# Altium PCB Печатная плата Peggy Receiver.PcbDoc
Units mm, origin at the board's own origin, x right, y up, seen from the top; angles counter-clockwise.
Board outline 36.5 x 63 mm, 2 copper layers (Top Layer, Bottom Layer); 41 components, 35 nets, 220 pads, 0 vias.
Unrouted connection lines stored in the file: 145.
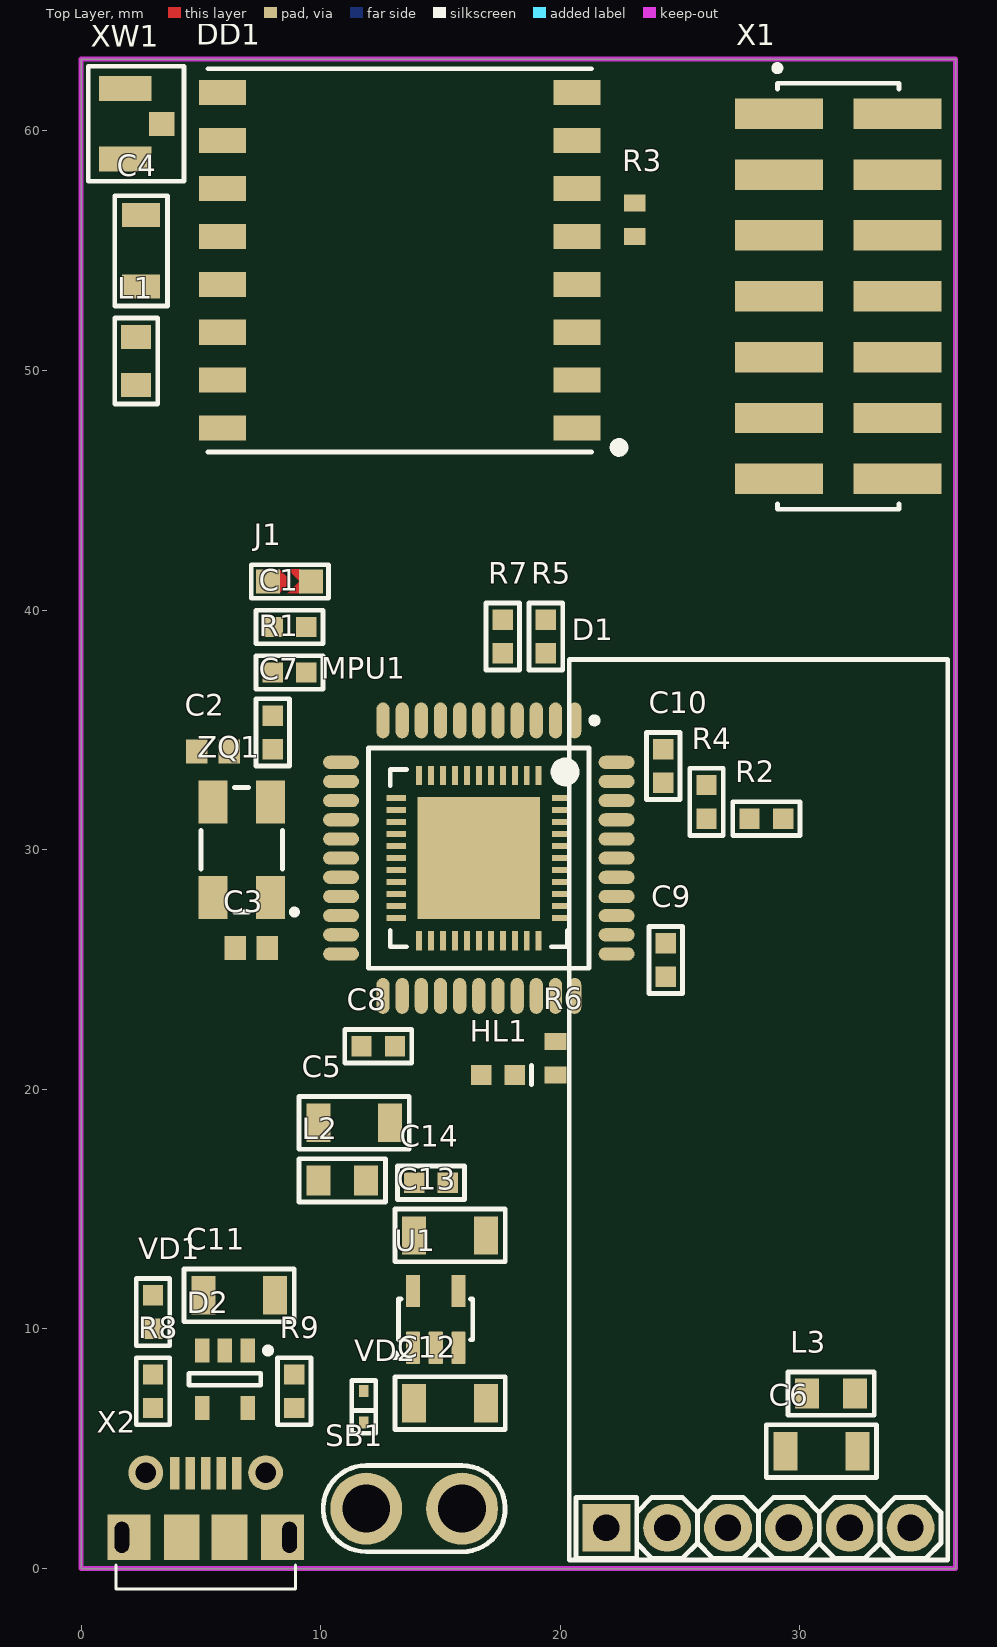
[diagram p0: Top Layer view]
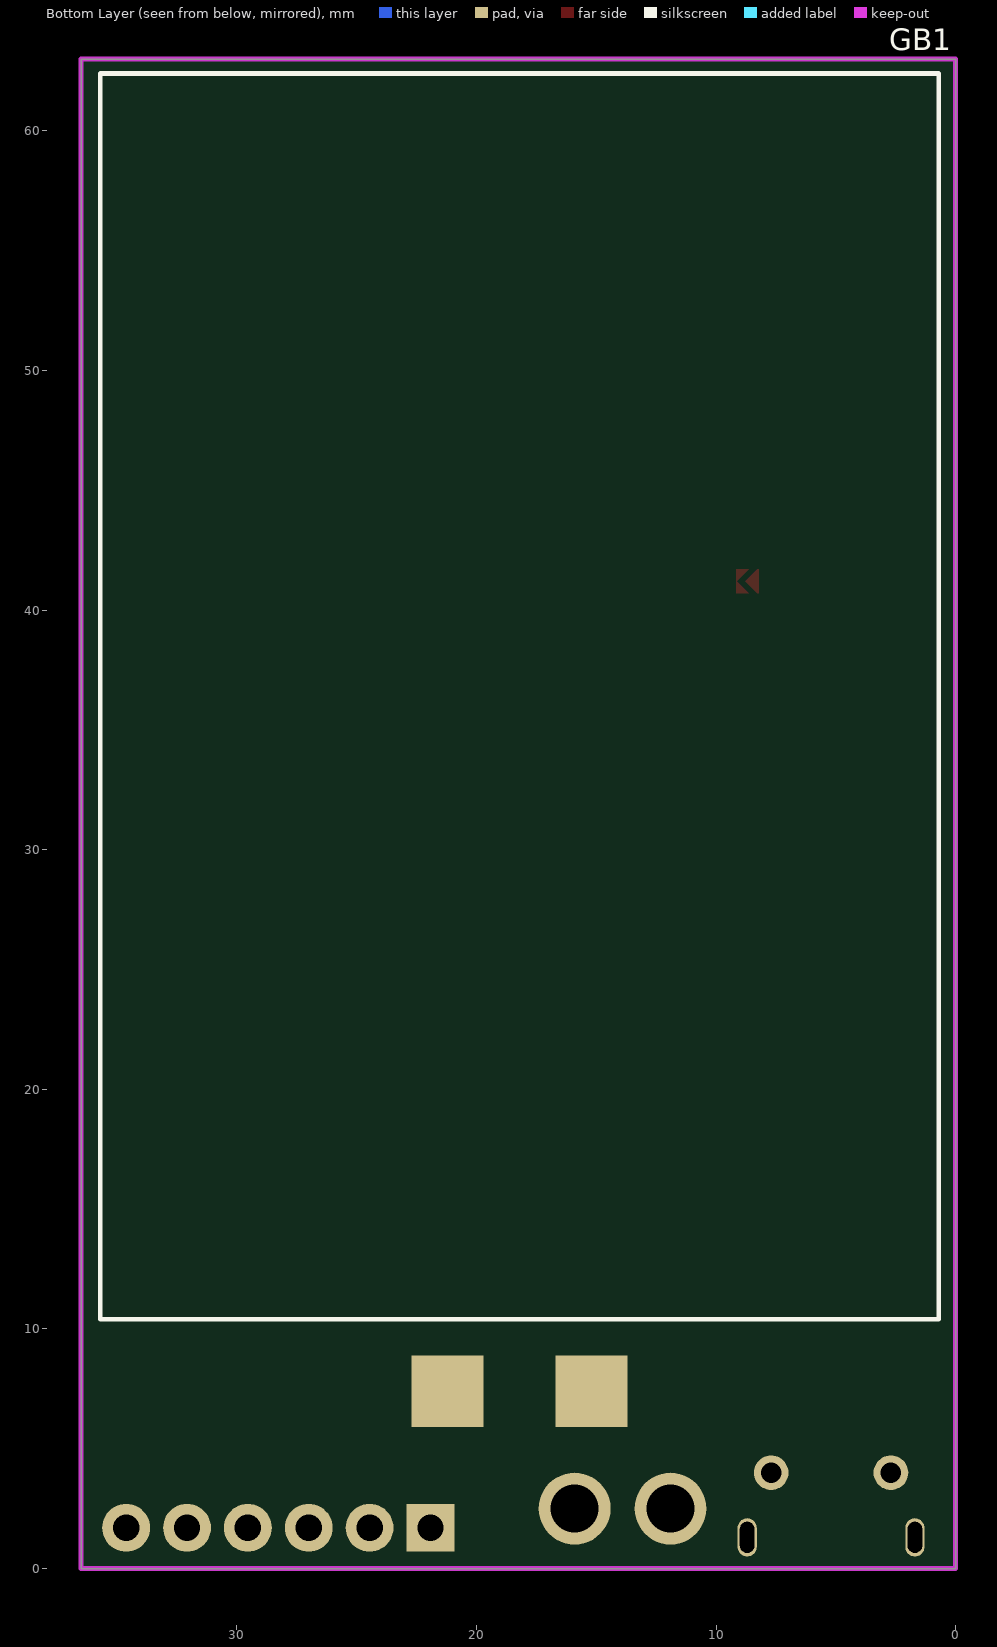
[diagram p1: Bottom Layer view, seen from below]

## Layer stack, top to bottom
Top Solder: solder mask 0.0102, Solder Resist, Dk 3.5
Top Layer: signal copper 0.0356
Dielectric 1: dielectric 0.32, FR-4, Dk 4.8
Bottom Layer: signal copper 0.0356
Bottom Solder: solder mask 0.0102, Solder Resist, Dk 3.5

## Board outline
0,0 0,63 36.5,63 36.5,0

## Design rules (kind name [scope] priority, off if disabled: settings)
Clearance [All] p1: gap=0.2 ignorepadtopadclearanceinfootprint=FALSE except(0: Arc-Hole Track-Hole SMDPad-Hole THPad-Hole Via-Hole Fill-Hole Poly-Hole Region-Hole Text-Hole)
PolygonConnect [All] p1: connectstyle=Relief reliefconductorwidth=0.254 reliefentries=4 polygonreliefangle="90 Angle" airgapwidth=0.254
RoutingVias [All] p1: holewidth=0.711 width=1.27 viastyle="Through Hole" minholewidth=0.711 minwidth=1.27 maxholewidth=0.711 maxwidth=1.27
SolderMaskExpansion [All] p1: expansion=0.102 istentingtop=FALSE
Width [All] p1: maxlimit=0.254 minlimit=0.254 preferedwidth=0.254
30 further rules are at their usual default settings.

## Classes and differential pairs
component class "Схема питания": C11 C12 C13 C14 D2 GB1 R8 R9 SB1 U1 VD1 VD2 X2
component class "Блок МК и радиомодуля Peggy Receiver": C1 C2 C3 C4 C5 C6 C7 C8 C9 C10 D1 DD1 HL1 J1 L1 L2 L3 MPU1 R1 R2 R3 R4 R5 R6 R7 WA1 WA2 X1 XW1 ZQ1

## Components (designator, comment, footprint, x,y, rotation, side; value= is the part's Value field where it differs from the comment)
C1 "0.1uF" CH0603C 8.7,39.3 r180 top
C2 "CC0603JPNPO9BN270" CAPC1608X87X35NL15T15 5.5,34.1 r180 top
C3 "CC0603JPNPO9BN270" CAPC1608X87X35NL15T15 7.1,25.9 r0 top
C4 "10uF" CH1206C 2.5,55 r90 top
C5 "10uF" CH1206C 11.4,18.6 r0 top
C6 "10uF" CH1206C 30.9,4.9 r180 top
C7 "0.1uF" CH0603C 8,34.9 r270 top
C8 "0.1uF" CH0603C 12.4,21.8 r180 top
C9 "0.1uF" CH0603C 24.4,25.4 r90 top
C10 "0.1uF" CH0603C 24.3,33.5 r270 top
C11 "10uF" CH1206C 6.6,11.4 r0 top
C12 "10uF" CH1206C 15.4,6.9 r0 top
C13 "10uF" CH1206C 15.4,13.9 r0 top
C14 "1uF" CH0603C 14.6,16.1 r0 top
D1 "HC-08" "MOD: SH-HC-08" 21.92,1.7 r90 top
D2 "MCP73831T-2ATI/OT" SOT23-5 6,7.9 r270 top
DD1 "RFM95W-868S2" RFM95W-868S2 20.7,47.6 r180 top
GB1 "LP103450JH+PCM+PTC+2 WIRES 70MM" "BAT: 34.5X52MM" 18.2,36.4 r0 bottom
HL1 "150060GS75000" CH0603LG 17.4,20.6 r180 top
J1 "Jumper-2" "CON: JUMPER_2" 8.7,41.2 r0 top
L1 "MH2029-471Y" MH2029-471Y-Footprint-1 2.3,50.4 r270 top
L2 "MH2029-471Y" MH2029-471Y-Footprint-1 10.9,16.2 r180 top
L3 "MH2029-471Y" MH2029-471Y-Footprint-1 31.3,7.3 r0 top
MPU1 "ATMEGA32U4-AU" ATMEGA32U4-MU 16.6,29.65 r270 top
R1 "RMCF0603FT4K70" CH0603R 8.7,37.4 r180 top
R2 "1k" CH0603R 28.6,31.3 r0 top
R3 "Resistor 100k +/-1% 0603 100 mW" RESC1608X55X25NL10T15 23.1,56.3 r90 top value=100k
R4 "3.6K" CH0603R 26.1,32 r270 top
R5 "22" CH0603R 19.4,38.9 r270 top
R6 "RMCF0603JT510R" RESC1608X55X25NL10T15 19.8,21.3 r270 top
R7 "22" CH0603R 17.6,38.9 r270 top
R8 "1k" CH0603R 3,7.4 r270 top
R9 "1k" CH0603R 8.9,7.4 r270 top
SB1 "\"Кнопка\"" "BUT: 2PADS 2x2mm" 11.9,2.5 r0 top
U1 "AP2112K-3.3TRG1" SOT-25 14.8,10.4 r90 top
VD1 "" CH0603LR 3,10.7 r90 top
VD2 "BAT54XV2T1G" SOD523 11.8,7.4 r270 top
X1 "TSM-107-01-T-DV" "CON: TSM-107-01-T-DV" 31.6,53.1 r270 top
X2 "\"microUSB\"" "CON: MicroUSB - TH" 5.2,1.3 r0 top
XW1 "u.Fl" "CON: u.Fl" 2.6,60.3 r90 top
ZQ1 "FY0800018" FY0800018-Footprint-1 6.7,30 r90 top

## Footprints (in the part's own frame and the unit in brackets; to place one, negate y for a bottom-side part, rotate by r counter-clockwise, add the part's x,y. Pads: shape width x height; smd on the part's side, far side on the other; paste and mask are expansions set on the pad)
ATMEGA32U4-MU [mm] "44-VQFN (7x7)"
  oval 1.5x0.55 smd: 1(-5.75,4) 2(-5.75,3.2) 3(-5.75,2.4) 4(-5.75,1.6) 5(-5.75,0.8) 6(-5.75,0) 7(-5.75,-0.8) 8(-5.75,-1.6) 9(-5.75,-2.4) 10(-5.75,-3.2) 11(-5.75,-4) 23(5.75,-4) 24(5.75,-3.2) 25(5.75,-2.4) 26(5.75,-1.6) 27(5.75,-0.8) 28(5.75,0) 29(5.75,0.8) 30(5.75,1.6) 31(5.75,2.4) 32(5.75,3.2) 33(5.75,4)
  rect 0.8x0.25 smd: 1(-3.45,2.5) 2(-3.45,2) 3(-3.45,1.5) 4(-3.45,1) 5(-3.45,0.5) 6(-3.45,0) 7(-3.45,-0.5) 8(-3.45,-1) 9(-3.45,-1.5) 10(-3.45,-2) 11(-3.45,-2.5) 23(3.45,-2.5) 24(3.45,-2) 25(3.45,-1.5) 26(3.45,-1) 27(3.45,-0.5) 28(3.45,0) 29(3.45,0.5) 30(3.45,1) 31(3.45,1.5) 32(3.45,2) 33(3.45,2.5)
  oval 0.55x1.5 smd: 12(-4,-5.75) 13(-3.2,-5.75) 14(-2.4,-5.75) 15(-1.6,-5.75) 16(-0.8,-5.75) 17(0,-5.75) 18(0.8,-5.75) 19(1.6,-5.75) 20(2.4,-5.75) 21(3.2,-5.75) 22(4,-5.75) 34(4,5.75) 35(3.2,5.75) 36(2.4,5.75) 37(1.6,5.75) 38(0.8,5.75) 39(0,5.75) 40(-0.8,5.75) 41(-1.6,5.75) 42(-2.4,5.75) 43(-3.2,5.75) 44(-4,5.75)
  rect 0.25x0.8 smd: 12(-2.5,-3.45) 13(-2,-3.45) 14(-1.5,-3.45) 15(-1,-3.45) 16(-0.5,-3.45) 17(0,-3.45) 18(0.5,-3.45) 19(1,-3.45) 20(1.5,-3.45) 21(2,-3.45) 22(2.5,-3.45) 34(2.5,3.45) 35(2,3.45) 36(1.5,3.45) 37(1,3.45) 38(0.5,3.45) 39(0,3.45) 40(-0.5,3.45) 41(-1,3.45) 42(-1.5,3.45) 43(-2,3.45) 44(-2.5,3.45)
  rect 5.1x5.1 smd: 45(0,0)
  silkscreen extent -5.87,-4.6 4.6,4.95, body extent -6,-6 6,6, height 1.2
"BAT: 34.5X52MM" [mm]
  rect 3x3 smd: 1(-3,29) 2(3,29)
  silkscreen extent -17.5,-26 17.5,26
"BUT: 2PADS 2x2mm" [mm]
  round 3 hole 2: 1(0,0) 2(4,0)
  silkscreen extent -1.79,-1.8 5.79,1.8
CAPC1608X87X35NL15T15 [mm] "Chip Capacitor, 2-Leads, Body 1.75x0.95mm, IPC Medium Density"
  rect 0.9x1 smd: 1(-0.675,0) 2(0.675,0)
  body extent -0.87,-0.48 0.87,0.48, height 0.87
CH0603C [mm] "Chip Capacitor, 2-Leads, Body 1,53x0,85mm, IPC Medium Density"
  rect 0.85x0.85 smd: 1(-0.7,0) 2(0.7,0)
  silkscreen extent -1.4,-0.7 1.4,0.7, body extent -0.8,-0.4 0.8,0.4, height 0.3
CH0603LG [mm] "Chip Capacitor, 2-Leads, Body 1,53x0,85mm, IPC Medium Density"
  rect 0.85x0.85 smd: 1(-0.7,0) 2(0.7,0)
  silkscreen extent -1.4,-0.4 -1.4,0.4, body extent -0.8,-0.4 0.8,0.4, height 0.6
CH0603LR [mm] "Chip Capacitor, 2-Leads, Body 1,53x0,85mm, IPC Medium Density"
  rect 0.85x0.85 smd: 1(-0.7,0) 2(0.7,0)
  silkscreen extent -1.4,-0.7 1.4,0.7, body extent -0.8,-0.4 0.8,0.4, height 0.6
CH0603R [mm]
  rect 0.85x0.85 smd: 1(-0.7,0) 2(0.7,0)
  silkscreen extent -1.4,-0.7 1.4,0.7, body extent -0.8,-0.4 0.8,0.4, height 0.44
CH1206C [mm] "Non polar chip capacitor, size 1206"
  rect 1x1.6 smd: 1(-1.5,0) 2(1.5,0)
  silkscreen extent -2.3,-1.1 2.3,1.1, body extent -1.6,-0.8 1.6,0.8, height 1
"CON: JUMPER_2" [mm]
  rect 1x1 smd: 1(-0.9,0) 2(0.9,0)
  Top Layer region: -0.475,0.5 -0.425,0.5 0.075,0 -0.425,-0.5 -0.475,-0.5
  Top Layer region: -0.075,0.5 0.425,0 -0.075,-0.5 0.45,-0.5 0.45,0.5
  silkscreen extent -1.6,-0.7 1.63,0.7
"CON: MicroUSB - TH" [mm] "Micro USB on-pcb connector, female"
  rect 0.4x1.35 smd: 1(-1.3,2.675) 2(-0.65,2.675) 3(0,2.675) 4(0.65,2.675) 5(1.3,2.675)
  oval 0.8x1.6 hole 0.6 slot 1.3 at 90 deg: 6(-3.5,0) 6(3.5,0)
  rect 1.8x1.9 smd: 6(-3.2,0) 6(3.2,0)
  round 1.45 hole 0.85: 6(-2.5,2.7) 6(2.5,2.7)
  rect 1.5x1.9 smd: 6(-1,0) 6(1,0)
  silkscreen extent -3.75,-2.15 3.75,-1.15, body extent -4.1,-2.58 4.1,2.85, height 2.68
"CON: TSM-107-01-T-DV" [mm]
  rect 1.27x3.68 smd: 1(-7.62,-2.475) 2(-7.62,2.475) 3(-5.08,-2.475) 4(-5.08,2.475) 5(-2.54,-2.475) 6(-2.54,2.475) 7(0,-2.475) 8(0,2.475) 9(2.54,-2.475) 10(2.54,2.475) 11(5.08,-2.475) 12(5.08,2.475) 13(7.62,-2.475) 14(7.62,2.475)
  silkscreen extent -9.65,-2.66 8.89,2.54, body extent -8.89,-3.68 8.89,3.68, height 9.65
"CON: u.Fl" [mm]
  rect 1x1.05 smd: 1(0,-0.763)
  rect 1.05x2.2 smd: 2(-1.475,0.763) 2(1.475,0.763)
  silkscreen extent -2.4,-1.7 2.4,2.3, body extent -1.5,-0.95 1.5,1.9, height 1.27
FY0800018-Footprint-1 [mm]
  rect 1.8x1.2 smd: 1(-2,-1.2) 2(2,-1.2) 3(2,1.2) 4(-2,1.2)
  silkscreen extent -2.7,-2.3 2.6,1.7, body extent -2.5,-1.59 2.5,1.59, height 1.1
MH2029-471Y-Footprint-1 [mm]
  rect 1x1.25 smd: 1(-1,0) 2(1,0)
  silkscreen extent -1.8,-0.9 1.8,0.9, body extent -1,-0.62 1,0.63, height 0.85
"MOD: SH-HC-08" [mm] "Bluetooth 4.0 BLE Module"
  rect 2x2 hole 1.1: 1(0,0)
  round 2 hole 1.1: 2(0,-2.54) 3(0,-5.08) 4(0,-7.62) 5(0,-10.16) 6(0,-12.7)
  silkscreen extent -1.34,-14.25 36.24,1.55, body extent -1.36,-14.17 36.23,1.53, height 6.31
RESC1608X55X25NL10T15 [mm] "Chip Resistor, 2-Leads, Body 1.70x0.90mm, IPC Medium Density"
  rect 0.7x0.9 smd: 1(-0.7,0) 2(0.7,0)
  body extent -0.85,-0.45 0.85,0.45, height 0.55
RFM95W-868S2 [mm] "RFID module"
  rect 1.95x1.05 smd: 1(0,0) 2(0,-2) 3(0,-4) 4(0,-6) 5(0,-8) 6(0,-10) 7(0,-12) 8(0,-14) 9(14.8,-14) 10(14.8,-12) 11(14.8,-10) 12(14.8,-8) 13(14.8,-6) 14(14.8,-4) 15(14.8,-2) 16(14.8,0)
  silkscreen extent -2.04,-15 15.4,1.1, body extent -0.6,-14.93 15.4,0.97, height 2.24
SOD523 [mm]
  rect 0.5x0.4 smd: 1(0,0) 2(1.3,0)
  silkscreen extent -0.45,-0.5 1.75,0.5, body extent -0.17,-0.4 1.48,0.4, height 0.65
SOT23-5 [mm] "SOT23, 5-Leads, Body 2,90x2,80mm, Pitch 0,95mm, IPC Medium Density"
  rect 1x0.6 smd: 1(-1.2,0.95) 2(-1.2,0) 3(-1.2,-0.95) 4(1.2,-0.95) 5(1.2,0.95)
  round 0.5 on Mech1: ""(-1.1,1.1)
  silkscreen extent -1.32,-1.5 0.25,1.92, body extent -1.5,-1.5 1.5,1.5, height 1.3
SOT-25 [mm]
  rrect15% 1.35x0.6 smd: 1(-1.185,0.95) 2(-1.185,0) 3(-1.185,-0.95) 4(1.185,-0.95) 5(1.185,0.95)
  silkscreen extent -1.6,-1.55 0.85,1.8, body extent -1.4,-1.5 1.4,1.5, height 1.4

## Part data
C1 C7 C8 C9 C10: library part Capacitor, Manufacturer="Murata Electronics", Supplier Part Number 1=490-4779-1-ND, ComponentKind="0603 (1608 Metric)", HelpURL=https://www.digikey.com/en/products/detail/murata-electronics/GCM188R71H104KA57D/1641653?s=N4IgTCBcDaIOIGECyBGAHGgSgdhQCRQAYAWAaQEEBWbAERAF0BfIA, Model=GCM188R71H104KA57D, Supplier 1=Digi-Key
C2 C3: library part CMP-009-00292-1, "0603 50V C0G 27pF 5% multilayer ceramic capacitor", Capacitance=27pF, Case Code (Imperial)=0603, Case Code (Metric)=1608, Dielectric=C0G, Manufacturer=YAGEO, Max Operating Temperature=125°C, Min Operating Temperature=-55°C, Package Quantity=15000, Tolerance=5%, Voltage Rating=50V, Case/Package=0603, Depth=0.8mm, Length=1.6mm, Manufacturer Part Number=CC0603JPNPO9BN270, Packaging="Tape and Reel", Pins=2, RoHS Compliant=Yes, Series=NP0, Termination=SMD/SMT
C4 C5 C6 C11 C12 C13: library part Capacitor, "CAP CER 10UF 16V X7R 1206", Manufacturer="Murata Electronics", Supplier Part Number 1=490-14746-1-ND, ComponentKind="1206 (3216 Metric)", HelpURL=https://www.digikey.com/en/products/detail/murata-electronics/GCM31CR71C106KA64K/2592432?s=N4IgTCBcDaIOIGECyBmAjAgSgdg2gDAGwDSAgoQCzEgC6AvkA, Model=GCM31CR71C106KA64K, Supplier 1=Digi-Key
C14: library part Capacitor, Manufacturer="Samsung Electro-Mechanics", Supplier Part Number 1=1276-1946-1-ND, ComponentKind="0603 (1608 Metric)", HelpURL=https://www.digikey.com/en/products/detail/samsung-electro-mechanics/CL10B105KP8NNNC/3887604, Model=CL10B105KP8NNNC, Supplier 1=Digi-Key
D1: "Bluetooth 4.0 module", Manufacturer=China, ComponentKind="Bluetooth 2.4GHz", Model=HC-08
D2: "Li-ion chargers", Manufacturer="Microchip Technology", Supplier Part Number 1=MCP73831T-2ATI/OTCT-ND, ComponentKind=SOT23-5, HelpURL=https://www.digikey.com/en/products/detail/microchip-technology/MCP73831T-2ATI-OT/964303, Model=MCP73831T-2ATI/OT, Supplier 1=Digi-Key
DD1: library part CMP-032-0024-3, "RF TXRX MODULE ISM<1GHZ", Case/Package=SMD/SMT, Current - Receiving=12.1mA, Current - Transmitting=120mA, Frequency=868MHz, Manufacturer="RF Solutions", Max Operating Temperature=70°C, Min Operating Temperature=-20°C, Data Rate=300Kbps, Interface=SPI, Manufacturer Part Number=RFM95W-868S2, Mount="Surface Mount", Packaging=Bulk, Sensitivity=-123dBm
GB1: "LiPo Battery", Manufacturer="Jauch Quartz", Supplier Part Number 1=1908-LP103450JH+PCM+PTC+2WIRES70MM-ND, HelpURL=https://www.digikey.com/en/products/detail/jauch-quartz/LP103450JH-PCM-PTC-2-WIRES-70MM/9560994, Model="LP103450JH+PCM+PTC+2 WIRES 70MM", Supplier 1=Digi-Key
HL1: library part CMP-007-00037-1, "WURTH ELEKTRONIK - 150060GS75000 - LED, Green, 520 nm, 3.2 V, 30 mA, 430 mcd RoHS Compliant: Yes", Case Code (Imperial)=0603, Case Code (Metric)=1608, Color=Green, Forward Current=30mA, Forward Voltage=3.2V, Manufacturer="Würth Elektronik", Max Operating Temperature=85°C, Min Operating Temperature=-40°C, Package Quantity=4000, Test Current=20mA, Case/Package=0603, Colour=Green, Dominant Wavelength=520nm, Height=0.7mm, Lead Free="Lead Free", Length=1.6mm, Lens Style=Clear,Rectangular, Luminous Intensity=430mcd, Manufacturer Part Number=150060GS75000, Mount="Surface Mount", Packaging="Tape and Reel", REACH SVHC=Unknown, RoHS Compliant=Yes, Viewing Angle=140°, Wavelength=520nm, Width=0.8mm
J1: "Jumper", Manufacturer=China, Model=PLS-2
L1 L2 L3: library part CMP-006-00041-1, "Ferrite Beads High Current Chip 470Ohm 25% 100MHz 1A 0.2Ohm DCR 0805 T/R", Case Code (Imperial)=0805, Case Code (Metric)=2012, DC Resistance (DCR)=200mR, Manufacturer="Bourns Inc.", Max Current Rating=1A, Max Operating Temperature=125°C, Min Operating Temperature=-55°C, Package Quantity=4000, Test Frequency=100MHz, Tolerance=25%, Case/Package=0805, Core Material=Ferrite, Depth=1.4mm, Height=0.043inch, Impedance=470, Length=0.079inch, Manufacturer Part Number=MH2029-471Y, Max DC Current=1A, Mount="Surface Mount", Number of Lines=1, Packaging="Tape and Reel", RoHS Compliant=Yes, Series=MH, Termination=SMD/SMT, Width=1.2mm
MPU1: library part CMP-020-00016-10, "8-bit Microcontroller with 32 Kbytes of ISP Flash and USB Controller, 2.7 to 5.5 V, -40 to 85 degC, 44-Pin QFP, Tray", Case/Package=TQFP, Frequency=16MHz, Manufacturer=Atmel, Manufacturer Part Number=ATMEGA32U4-AUR, Max Operating Temperature=85°C, Max Supply Voltage=5.5V, Min Operating Temperature=-40°C, Min Supply Voltage=2.7V, Package Description="44-Pin Thin Profile Plastic Quad Flat Papckage, Body 10 x 10 mm, Pitch 0.8 mm", Package Quantity=800, Package Reference=44ML, Package Version="Rev. J, 02/2014", ADC Channels=12, Datasheet URL=http://www.atmel.com/images/atmel-7766-8-bit-avr-atmega16u4-32u4_summary.pdf, Datasheet Version="Rev. 7766IS, 07/2015", Density=32KB, Ethernet Channels=0, I/Os=26, Interface=USART, Manufacturer URL=http://www.atmel.com/, Max Clock Frequency=16MHz, Mounting Technology=SM, Package URL=http://www.atmel.com/images/atmel-7766-8-bit-avr-atmega16u4-32u4_summary.pdf, Packaging=Tray, Pins=44, PWM Channels=8, RAM Size=2.5KB, RoHS Compliant=True
R1: library part CMP-009-00269-2, "Res Thick Film 0603 4.7K Ohm 1% 1/10W 100ppm/C Molded SMD SMD Paper T/R", Case Code (Imperial)=0603, Case Code (Metric)=1608, Manufacturer="Stackpole Electronics Inc", Max Operating Temperature=155°C, Max Power Dissipation=100mW, Min Operating Temperature=-55°C, Resistance=4.7k, Resistor Type="Thick Film", Temperature Coefficient=100ppm/°C, Tolerance=1%, Case/Package=0603, Component Comment="4.7k 100mW", Construction=Rectangular, Contact Plating=Tin,Matte, Depth=0.8mm, Features="Automotive AEC-Q200", Height=0.022inch, Lead Free="Lead Free", Length=1.55mm, Manufacturer Part Number=RMCF0603FT4K70, Military Standard=Not, Mount="Surface Mount", Number of Terminations=2, Packaging="Tape and Reel", Power Rating=100mW, Radiation Hardening=No, RoHS Compliant=Yes, Series=RMCF, Width=0.031inch
R2 R8 R9: library part Resistor, Manufacturer=YAGEO, Supplier Part Number 1=311-1.00KHRCT-ND, ComponentKind="0603 (1608 Metric)", HelpURL=https://www.digikey.com/en/products/detail/yageo/RC0603FR-071KL/726843, Model=RC0603FR-071KL, Supplier 1=Digi-Key
R3: library part CMP-009-00023-7, "Chip Resistor, 100 KOhm, +/- 1%, 0.1 W, -55 to 155 degC, 0603 (1608 Metric)", Case/Package=0603, Max Operating Temperature=155°C, Min Operating Temperature=-55°C, Power=100mW, Tolerance=1%, Voltage Rating=50V, Mounting Technology=SM, Pins=2, RoHS Compliant=True
R4: library part Resistor, "RES 3.6K OHM 1% 1/10W 0603", Manufacturer=YAGEO, Supplier Part Number 1=311-3.60KHRCT-ND, ComponentKind="0603 (1608 Metric)", HelpURL=https://www.digikey.com/en/products/detail/yageo/RC0603FR-073K6L/727132, Model=RC0603FR-073K6L, Supplier 1=Digi-Key
R5 R7: library part Resistor, "RES 22 OHM 1% 1/10W 0603", Manufacturer=YAGEO, Supplier Part Number 1=311-22.0HRCT-ND, ComponentKind=https://www.digikey.com/en/products/detail/yageo/RC0603FR-0722RL/727055, HelpURL=https://www.digikey.com/en/products/detail/yageo/RC0603FR-0722RL/727055, Model=RC0603FR-0722RL, Supplier 1=Digi-Key
R6: library part CMP-00079-1, "510 Ohms ±5% 0.1W, 1/10W Chip Resistor 0603 (1608 Metric) Automotive AEC-Q200 Thick Film", Case Code (Imperial)=0603, Case Code (Metric)=1608, Manufacturer="Stackpole Electronics Inc", Max Operating Temperature=155°C, Max Power Dissipation=100mW, Min Operating Temperature=-55°C, Resistance=510, Resistor Type="Thick Film", Temperature Coefficient=200ppm/°C, Tolerance=5%, Case/Package=0603, Construction=Rectangular, Contact Plating=Tin,Matte, Depth=0.8mm, Features="Automotive AEC-Q200", Height=0.022inch, Lead Free="Lead Free", Length=0.061inch, Manufacturer Part Number=RMCF0603JT510R, Military Standard=Not, Mount="Surface Mount", Number of Terminations=2, Packaging="Tape and Reel", Power Rating=100mW, Radiation Hardening=No, RoHS Compliant=Yes, Series=RMCF, Size Code=0603, Width=0.031inch
SB1: library part "Tactile switches", "Tactile switches", Manufacturer="CW Industries", Supplier Part Number 1=CW103-ND, ComponentKind=https://www.digikey.com/en/products/detail/cw-industries/GRB112B802BR1/2349683, HelpURL=https://www.digikey.com/en/products/detail/cw-industries/GRB112B802BR1/2349683, Model=GRB112B802BR1, Supplier 1=Digi-Key
U1: "IC REG LINEAR 3.3V 600MA SOT25", Manufacturer="Diodes Incorporated", Supplier Part Number 1=AP2112K-3.3TRG1DICT-ND, ComponentKind=SOT-25, ComponentLink1Description=HelpURL, ComponentLink1URL=https://www.digikey.com/en/products/detail/diodes-incorporated/AP61100Z6-7/11696569, HelpURL=https://www.digikey.com/en/products/detail/diodes-incorporated/AP2112K-3-3TRG1/4470746, Model=AP2112K-3.3TRG1, Supplier 1=Digi-Key
VD1: library part LED, Manufacturer="Lite-On Inc.", Supplier Part Number 1=160-1447-1-ND, ComponentKind="0603 (1608 Metric)", HelpURL=https://www.digikey.com/en/products/detail/liteon/LTST-C191KRKT/386837, Model=LTST-C191KRKT, Supplier 1=Digi-Key
VD2: library part Diod, Manufacturer=onsemi, Supplier Part Number 1=BAT54XV2T1GOSCT-ND, ComponentKind=SOD-523, HelpURL=https://www.digikey.com/en/products/detail/onsemi/BAT54XV2T1G/918321, Model=BAT54XV2T1G, Supplier 1=Digi-Key
X1: library part 14-Connector, Manufacturer="Samtec Inc.", Supplier Part Number 1=SAM10810-ND, ComponentKind="Connector Header Surface Mount 14 position", HelpURL=https://www.digikey.com/en/products/detail/samtec-inc/TSM-107-01-T-DV/2685677, Model=TSM-107-01-T-DV, Supplier 1=Digi-Key
X2: library part "USB - micro AB", "USB", Manufacturer=Molex, Supplier Part Number 1=WM1399CT-ND, HelpURL=https://www.digikey.com/en/products/detail/molex/1050170001/2350832?s=N4IgTCBcDaIDoBcCMAGArCpB2AtC-SIAugL5A, Model=1050170001, Supplier 1=Digi-Key
XW1: "RF", Manufacturer="Hirose Electric Co Ltd", Supplier Part Number 1=CONUFL001-SMD-TCT-ND, ComponentKind="Surface Mount Solder", HelpURL=https://www.digikey.com/en/products/detail/linx-technologies-inc/CONUFL001-SMD-T/7427732?s=N4IgTCBcDaIMIHkByBVAYgGQAxYIwFoBlAWQBF8AVEAXQF8g, Model=CONUFL001-SMD-T, Supplier 1=Digi-Key
ZQ1: library part CMP-003-00033-4, "Crystal 8MHz ±30ppm (Tol) ±30ppm (Stability) 18pF FUND 100Ohm 4-Pin SMD T/R", Case/Package=SMD/SMT, ESR (Equivalent Series Resistance)=100R, Frequency=8MHz, Frequency Stability=30ppm, Load Capacitance=18pF, Manufacturer="Diodes Incorporated", Max Operating Temperature=85°C, Min Operating Temperature=-40°C, Frequency Tolerance=30ppm, Height=0.043inch, Length=0.197inch, Manufacturer Part Number=FY0800018, Mount="Surface Mount", Packaging="Cut Tape", Width=0.126inch

## Nets (pads, with @x,y where several pads share a name; then routed paths per layer and width w, separated by ;. In a path a pad name is that pad's centre, name@x,y a point inside that pad or via, vN(x,y) a via of type N, cw(c..) or ccw(c..) an arc to the next point about the centre after c; other vN are vias at no path point)
3.3V: C13.1 C14.1 L1.2 L2.1 L3.1 U1.5
3.3V_BLE: C6.1 D1.5 D1.6 L3.2
3.3VD: C5.1 C7.1 C8.1 C9.1 C10.1 HL1.2 L2.2 MPU1.14 MPU1.24 MPU1.34 MPU1.44 R1.2 X1.2
3.3VDA: C4.1 DD1.13 L1.1 R3.2
GND: C1.2 C2.1 C3.1 C4.2 C5.2 C6.2 C7.2 C8.2 C9.2 C10.2 C11.2 C12.2 C13.2 C14.2 D1.4 D2.2 DD1.1 DD1.8 DD1.10 GB1.2 J1.1 MPU1.5 MPU1.15 MPU1.23 MPU1.35 MPU1.43 MPU1.45 R4.1 R9.1 U1.2 X1.3 X1.8 X1.10 X1.11 X1.12 X2.5 X2.6 XW1.2 ZQ1.2 ZQ1.4
HC-08_RX: D1.2 MPU1.21
HC-08_STAT: D1.1 MPU1.22
HC-08_TX: D1.3 MPU1.20
NetC2_2: C2.2 MPU1.17 ZQ1.1
NetC3_2: C3.2 MPU1.16 ZQ1.3
NetC12_1: C12.1 SB1.2 U1.1 U1.3
NetD2_1: D2.1 VD1.2
NetD2_5: D2.5 R9.2
NetDD1_9: DD1.9 XW1.1
NetHL1_1: HL1.1 R6.2
NetMPU1_3: MPU1.3 R5.2
NetMPU1_4: MPU1.4 R7.2
NetMPU1_32: MPU1.32 R6.1
NetMPU1_41: MPU1.41 R2.1 R4.2
NetR5_1: R5.1 X2.2
NetR7_1: R7.1 X2.3
NetR8_1: R8.1 VD1.1
"PF4 TCK": MPU1.39 X1.13
"PF5 TMS": MPU1.38 X1.14
"PF6 TDO": MPU1.37 X1.6
"PF7 TDI": MPU1.36 X1.4
RESET: C1.1 J1.2 MPU1.13 R1.1 X1.5
RFM_DIO0: DD1.14 MPU1.1
RFM_MISO: DD1.2 MPU1.11 X1.9
RFM_MOSI: DD1.3 MPU1.10 X1.1
RFM_NSS: DD1.5 MPU1.28 R3.1
RFM_RST: DD1.6 MPU1.25
RFM_SCK: DD1.4 MPU1.9 X1.7
VBAT: C11.1 D2.3 GB1.1 R2.2 VD2.1
VBUS: D2.4 R8.2 SB1.1 VD2.2 X2.1
pads on no net: D2. DD1.7 DD1.11 DD1.12 DD1.15 DD1.16 MPU1.2 MPU1.6 MPU1.7 MPU1.8 MPU1.12 MPU1.18 MPU1.19 MPU1.26 MPU1.27 MPU1.29 MPU1.30 MPU1.31 MPU1.33 MPU1.40 MPU1.42 U1.4 X2.4

## Keep-outs
Keep-Out Layer:
  the board outline again, w0.2